# EAGLE board smartsensorPowered (EAGLE 7.4.0)
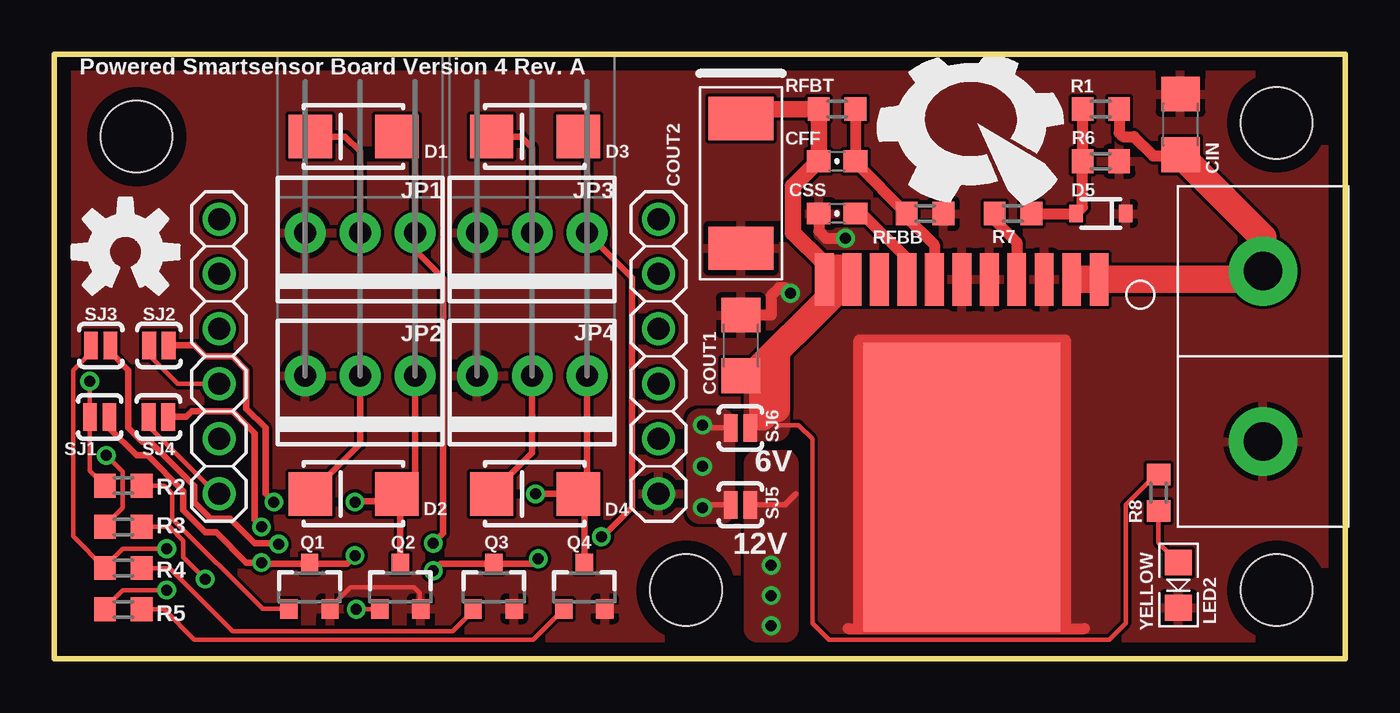
[diagram p0: board, top side]
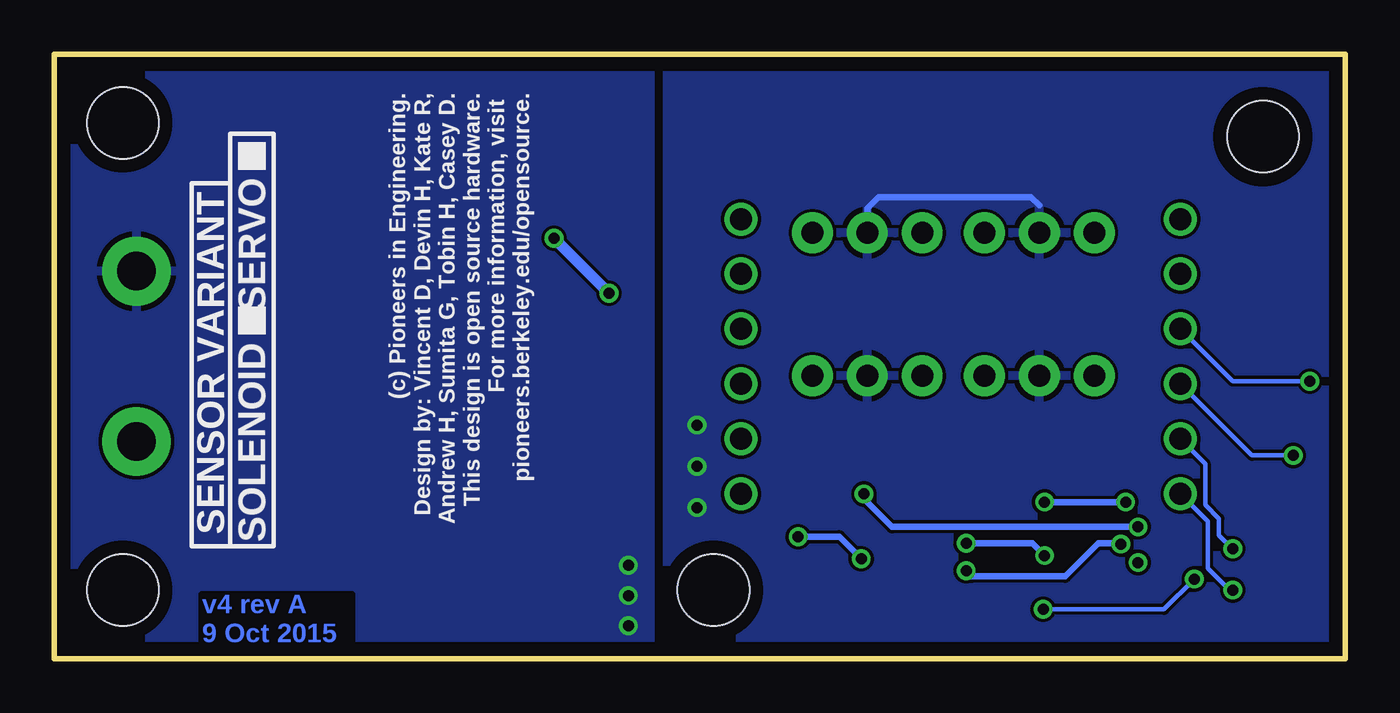
[diagram p1: board, bottom side, seen from below]

Size 59.69 x 27.94 mm. Coordinates in mm from the lower left corner, seen from the top.
Outline: 0,0 59.69,0 59.69,27.94 0,27.94 0,0
Copper layers (1*16): Top 2mil / dielectric 9mil / Bottom 2mil
Design rules "advancedcircuits-33each-pie": minimum track width 6mil, minimum drill 15mil, track to track 6mil, track to pad 6mil, pad to pad 6mil, via to via 6mil, smd to smd 6mil, copper to edge 25mil, drill to drill 7mil, minimum pad ring 7mil, minimum via ring 7mil, stop-mask expansion 3mil, vias tented up to drill 21mil, thermal gap 10mil

## Footprints (pad centres in the part's own frame; a part is rotated, then mirrored left to right if it is on the bottom)
0603-CAP = smd 1.1 x 1: 1 -0.85,0; 2 0.85,0
1206 = smd 1.6 x 1.8: 1 -1.4,0; 2 1.4,0
ANDERSON_VERTICAL = drill 1.778 pad 3.175: PIN1 0,-3.937; PIN2 0,3.937
TANT_CASE_E = smd 2 x 3: NEG 3,0; POS -3,0
SMA-DIODE_ALT = smd 2 x 2: A -2,0; C 2,0
SOD-323 = smd 0.63 x 0.83: 1 -1.15,0; 2 1.15,0
1X03-MTA = drill 1.016 pad 1.88: 1 -2.54,0; 2 0,0; 3 2.54,0
1X06 = drill 1.016 pad 1.524: 1 -6.35,0; 2 -3.81,0; 3 -1.27,0; 4 1.27,0; 5 3.81,0; 6 6.35,0
LED-0805 = smd 1.194 x 1.245: A -1.041,0; C 1.041,0
SOT23-3 = smd 0.8 x 0.9: 1 -0.95,-1; 2 0.95,-1; 3 0,1.1
R0603 = smd 1 x 1.1: 1 -0.85,0; 2 0.85,0
SJ_2S-NO = smd 0.635 x 1.27: 1 -0.45,0; 2 0.45,0
LMZ12010 = smd 0.861 x 2.41: 1 -6.35,-9.601; 2 -5.08,-9.601; 3 -3.81,-9.601; 4 -2.54,-9.601; 5 -1.27,-9.601; 6 0,-9.601; 7 1.27,-9.601; 8 2.54,-9.601; 9 3.81,-9.601; 10 5.08,-9.601; 11 6.35,-9.601 | smd 9.119 x 13.36: GND 0,0
STAND-OFF = hole 3.302: 0,0

## Placement (x,y rotation side)
CFF  4.7nF  [0603-CAP]  36.2,22.99 0 top
CIN  10uF  [1206]  52.07,24.69 90 top
CONN1  ANDERSONVERTICAL  [ANDERSON_VERTICAL]  55.88,13.97 0 top
COUT1  47uF  [1206]  31.75,14.48 90 top
COUT2  470uF  [TANT_CASE_E]  31.75,21.97 270 top
CSS  .47uF  [0603-CAP]  36.2,20.57 180 top
D1  SS16  [SMA-DIODE_ALT]  13.84,24.13 180 top
D2  SS16  [SMA-DIODE_ALT]  13.84,7.62 180 top
D3  SS16  [SMA-DIODE_ALT]  22.23,24.13 180 top
D4  SS16  [SMA-DIODE_ALT]  22.23,7.62 180 top
D5  5.1V  [SOD-323]  48.39,20.57 180 top
JP1  [1X03-MTA]  14.15,19.68 180 top
JP2  [1X03-MTA]  14.15,13.08 180 top
JP3  [1X03-MTA]  22.1,19.68 180 top
JP4  [1X03-MTA]  22.1,13.08 180 top
JP5  [1X06]  7.62,13.97 270 top
JP6  [1X06]  27.94,13.97 270 top
LED2  YELLOW  [LED-0805]  51.97,3.4 270 top
Q1  IRFML8244  [SOT23-3]  11.81,3.3 0 top
Q2  IRFML8244  [SOT23-3]  16,3.3 0 top
Q3  IRFML8244  [SOT23-3]  20.32,3.3 0 top
Q4  IRFML8244  [SOT23-3]  24.51,3.3 0 top
R1  62k  [R0603]  48.39,25.4 0 top
R2  1k  [R0603]  3.2,8 0 top
R3  1k  [R0603]  3.2,6.1 0 top
R4  1k  [R0603]  3.2,4.19 0 top
R5  1k  [R0603]  3.2,2.29 0 top
R6  30k  [R0603]  48.39,22.99 180 top
R7  100  [R0603]  44.32,20.57 180 top
R8  330  [R0603]  51.05,7.67 90 top
RFBB  2.37k  [R0603]  40.26,20.57 0 top
RFBT  15.4k  [R0603]  36.2,25.4 180 top
SJ1  SOLDERJUMPERNO  [SJ_2S-NO]  2.11,11.18 0 top
SJ2  SOLDERJUMPERNO  [SJ_2S-NO]  4.85,14.48 0 top
SJ3  SOLDERJUMPERNO  [SJ_2S-NO]  2.16,14.48 0 top
SJ4  SOLDERJUMPERNO  [SJ_2S-NO]  4.83,11.18 0 top
SJ5  SOLDERJUMPERNO  [SJ_2S-NO]  31.72,7.11 180 top
SJ6  SOLDERJUMPERNO  [SJ_2S-NO]  31.72,10.67 180 top
U$2  [PIE-LOGO-SMALL]  42.67,24.77 0 top
U$3  LMZ12010  [LMZ12010]  41.96,7.92 180 top
U$4  [STAND-OFF]  3.81,24.13 0 top
U$5  [STAND-OFF]  29.21,3.17 0 top
U$6  [STAND-OFF]  56.52,3.17 0 top
U$7  [STAND-OFF]  56.52,24.77 0 top
U$10  [OSHW-LOGO-M]  3.3,18.8 0 top

## Library data of the parts
CFF CIN COUT1 CSS = pie; PIE-INT-REF-NUM: CAPACITOR-GENERIC
CONN1 = pie; PIE-INT-REF-NUM: Anderson
COUT2 = pie; PIE-INT-REF-NUM: CAPACITOR-TANTALUM
D1-D5 = pie; PIE-INT-REF-NUM: DIODE
JP1-JP4 = pie; PIE-INT-REF-NUM: MTA
JP5 JP6 = pie; PARTNUMBER: 965
LED2 = pie; PIE-INT-REF-NUM: LED
Q1-Q4 = pie; PIE-INT-REF-NUM: NMOS
R1-R8 RFBB RFBT = pie; PIE-INT-REF-NUM: RESISTOR-GENERIC
SJ1-SJ6 = pie; PIE-INT-REF-NUM: DNL
U$2 U$4-U$7 U$10 = pie
U$3 = pie; PIE-INT-REF-NUM: LMZ12010

## Nets
6V: CFF.1 COUT1.1 COUT2.POS R8.2 RFBT.2 SJ6.1 U$3.10 U$3.11
12V: CIN.1 CONN1.PIN2 R1.2 SJ5.1 U$3.1 U$3.2
DIODE: D5.2 R1.1 R6.2 R7.1
EN: R7.2 U$3.4
FB: CFF.2 RFBB.1 RFBT.1 U$3.7
GND: CIN.2 CONN1.PIN1 COUT1.2 COUT2.NEG CSS.2 D5.1 JP1.3 JP2.3 JP3.3 JP4.3 JP6.6 LED2.C Q1.2 Q2.2 Q3.2 Q4.2 R6.1 RFBB.2 U$3.3 U$3.5 U$3.6 U$3.GND
IO6: JP5.3 R2.1 SJ1.1
IO7: JP5.4 R3.1 SJ2.1
IO8: JP5.5 R4.1 SJ3.1
IO9: JP5.6 R5.1 SJ4.1
N$1: D1.A JP1.1 Q1.3 SJ1.2
N$2: Q1.1 R2.2
N$3: LED2.A R8.1
N$4: D2.A JP2.1 Q2.3 SJ2.2
N$5: Q2.1 R3.2
N$7: D3.A JP3.1 Q3.3 SJ3.2
N$8: Q3.1 R4.2
N$10: D4.A JP4.1 Q4.3 SJ4.2
N$11: Q4.1 R5.2
SS: CSS.1 U$3.8
VOUT: D1.C D2.C D3.C D4.C JP1.2 JP2.2 JP3.2 JP4.2 SJ5.2 SJ6.2

## Tracks (layer width: path | path; a pad name or v marks a point on that pad's centre or on a via)
6V
  Top 0.203: 33.4,10.67 33.53,10.79 34.42,10.79 35.05,10.16 35.05,1.65 35.81,0.89 48.77,0.89 49.53,1.65 49.53,7.11 50.94,8.52 R8.2 | U$3.11 35.61,16.82 35.56,16.76 | 35.81,18.29 36.07,18.03 36.07,17.02 35.94,17.02 35.94,16.89 35.56,16.51 35.62,16.45 | COUT2.POS 31.93,24.97 32.56,25.61 32.81,25.61 33.02,25.4 | COUT1.1 32.52,13.08 32.77,12.83 | 36.3,16.42 36.52,16.42 | 36.52,16.42 | 36.52,16.42 36.52,16.46 36.83,16.76
  Top 0.254: 32.64,10.67 SJ6.1 33.02,11.51 33.02,12.7
  Top 0.508: 33.78,13.08 33.4,12.7 | 32.77,13.72 33.15,13.72 33.91,14.48 33.91,14.73 33.78,14.61 33.78,13.34 33.66,13.46 32.64,13.46 | 35.18,22.86 35.31,22.99 CFF.1
  Top 0.762: CFF.1 RFBT.2 33.02,25.4 32.77,25.4 | 35.18,22.86 34.16,21.84 34.16,19.68 35.56,18.29 35.56,17.58 U$3.11 35.61,17.83 35.69,17.91 36.5,17.91 U$3.10 36.88,16.94 36.83,16.89 36.83,17.02 36.07,17.02 35.81,17.27 36.45,17.27 36.7,17.53 | 35.81,18.29 36.83,18.29 | 35.56,16.76 36.83,16.76
  Top 1.27: 33.02,12.7 33.4,12.32 | 33.4,12.32 33.4,11.56 33.15,11.56 32.77,11.18 32.77,12.83 | 33,13.36 33.38,13.36 33.4,13.34 | 33.4,13.34 33.4,12.7 33.4,12.32 | 33.4,13.34 33.4,13.46 32.64,13.46 35.62,16.45 36.01,16.83
  pour Top: 32.51,10.67 32.51,13.21 33.4,13.46 33.4,10.67
12V  (via drill 0.51)
  Top 0.254: SJ5.1 33.78,7.11 34.29,7.62 | U$3.2 47.37,17.53 | 48.01,17.53 U$3.1
  Top 0.508: R1.2 49.24,24.3 49.4,24.13 49.91,24.13 50.8,23.24 52.02,23.24 CIN.1
  Top 1.27: CIN.1 55.88,19.48 CONN1.PIN2 55.5,17.53 U$3.1 | 47.37,17.53 48.01,17.53
  other vias: 33.15,4.32 33.15,2.92 33.15,1.52
  pour Bottom (rank 6): 32.13,0 32.13,27.94 59.69,27.94 59.69,0
  pour Top: 32.51,9.02 32.51,1.4 33.78,1.4 33.78,9.02
DIODE
  Top 0.508: R7.1 D5.2 47.54,20.87 R6.2 R1.1
EN
  Top 0.508: R7.2 43.47,20.28 44.5,19.25 U$3.4
FB
  Top 0.508: U$3.7 40.69,19.13 39.41,20.41 RFBB.1 37.05,22.94 CFF.2 RFBT.1
GND  (via drill 0.51)
  Top 0.203: Q1.2 12.76,2.35 13.72,3.3 16.64,3.3 16.89,3.05 16.89,2.36 Q2.2 | 36.7,1.4 37.08,1.4 37.21,1.52
  Top 0.305: 25.7,2.54 Q4.2 25.46,2.35
  Top 0.508: 37.21,1.52 37.21,14.73 46.74,14.73 46.74,1.52 | 36.7,1.4 47.62,1.4 | CSS.2 35.34,19.77 35.69,19.43 v36.58,19.43 | COUT1.2 33.14,15.88 33.15,15.88 33.15,16.76 33.53,17.14 33.78,17.14 v34.04,16.89
  Bottom 0.508: v36.58,19.43 v34.04,16.89
  pour Top (rank 3): 0,0 0,27.94 59.69,27.94 59.69,0
IO6  (via drill 0.51)
  Top 0.203: R2.1 1.66,8.69 SJ1.1 1.66,12.69 1.65,12.7 v1.65,12.83
  Bottom 0.203: v1.65,12.83 5.21,12.83 JP5.3
IO7  (via drill 0.51)
  Top 0.203: R3.1 2.35,6.16 3.17,6.99 3.17,8.64 v2.41,9.4 | SJ2.1 4.4,14.01 5.71,12.7 JP5.4
  Bottom 0.203: v2.41,9.4 4.32,9.4 JP5.4
IO8  (via drill 0.51)
  Top 0.203: v5.21,5.08 3.17,5.08 2.35,4.25 R4.1 0.89,5.65 0.89,13.34 1.71,14.15 SJ3.1
  Bottom 0.203: JP5.5 6.48,9.02 6.48,7.11 5.84,6.48 5.84,5.71 v5.21,5.08
IO9  (via drill 0.51)
  Top 0.203: R5.1 2.35,2.35 3.17,3.17 v5.21,3.17 | SJ4.1 4.38,10.74 7.24,7.87 7.37,7.87 JP5.6
  Bottom 0.203: v5.21,3.17 5.33,3.17 6.35,4.19 6.35,6.35 JP5.6
N$1  (via drill 0.51)
  Top 0.203: D1.A 15.88,24.13 | 11.83,4.42 Q1.3
  Top 0.305: 15.88,24.13 16.69,23.32 JP1.1 16.69,18.87 17.98,17.58 17.98,5.79 v17.53,5.33 | v13.91,4.77 13.54,4.4 Q1.3 9.63,4.4 v9.59,4.45 8.89,4.45 7.49,5.84 6.99,5.84 5.97,6.86 5.97,7.75 4.32,9.4 3.81,9.4 2.56,10.65 SJ1.2
  Bottom 0.305: v17.53,5.33 14.47,5.33 v13.91,4.77
N$2
  Top 0.203: 10.85,2.29 Q1.1 9.64,2.3 5.46,6.48 5.46,7.62 5.08,8 R2.2
  Top 0.305: 10.72,2.16 Q1.1
N$3
  Top 0.203: R8.1 51.05,5.36 LED2.A
N$4  (via drill 0.51)
  Top 0.203: D2.A 15.84,7.27 16,7.11 | 13.94,7.27 v13.91,7.24
  Top 0.305: JP2.1 16.69,8.46 D2.A | 16,7.11 Q2.3 | 15.84,7.27 13.94,7.27 | SJ2.2 6.48,14.48 6.99,13.97 8.26,13.97 8.89,13.34 8.89,11.56 9.78,10.67 9.78,7.62 v10.16,7.24
  Bottom 0.305: v13.91,7.24 v10.16,7.24
N$5  (via drill 0.51)
  Top 0.203: 15.05,2.35 Q2.1 15.04,2.29 v13.97,2.29 | R3.2 5.33,6.1 5.97,5.46 5.97,4.7 v6.99,3.68
  Bottom 0.203: v6.99,3.68 8.38,2.29 v13.97,2.29
N$7  (via drill 0.51)
  Top 0.203: D3.A 24.26,24.13 24.64,23.75 | v25.3,5.64 25.35,5.64 | 20.34,4.38 Q3.3 | SJ3.2 2.61,14.15 | 10.35,5.33 v10.38,5.3
  Top 0.305: 24.64,23.75 JP3.1 26.72,17.6 26.72,7.01 25.35,5.64 | 20.34,4.38 22.14,4.38 v22.38,4.62 | Q3.3 17.86,4.4 v17.53,4.06 | 2.61,14.15 3.43,13.34 3.43,10.67 4.06,10.03 4.45,10.03 6.48,8 6.48,7.24 7.24,6.48 8.13,6.48 9.27,5.33 10.35,5.33
  Bottom 0.305: v17.53,4.06 17.27,3.81 12.95,3.81 11.43,5.33 10.41,5.33 v10.38,5.3 | v25.3,5.64 23.39,5.64 v22.38,4.62
N$8
  Top 0.203: Q3.1 19.37,2.23 18.41,1.27 8.26,1.27 5.33,4.19 R4.2
N$10  (via drill 0.51)
  Top 0.203: 24.64,8.03 D4.A 24.26,7.62 24.51,7.37
  Top 0.305: JP4.1 24.64,8.03 | 24.51,7.37 Q4.3 | v22.26,7.62 D4.A | SJ4.2 6.1,11.18 6.35,11.43 8.26,11.43 9.27,10.41 9.27,6.41 v9.59,6.1
  Bottom 0.305: v9.59,6.1 20.95,6.1 22.26,7.4 v22.26,7.62
N$11
  Top 0.203: 23.56,2.25 Q4.1 22.15,0.89 6.48,0.89 5.08,2.29 R5.2
SS
  Top 0.508: 37.21,20.57 CSS.1 37.34,20.57 39.37,18.54 39.37,17.6 39.42,17.55 U$3.8
VOUT  (via drill 0.51)
  Top 0.254: SJ5.2 30.1,7.11 v29.97,6.99 | SJ6.2 30.1,10.67 v29.97,10.79
  Top 0.305: D1.C 13.46,24.13 14.15,23.44 JP1.2 | JP2.2 14.15,9.93 D2.C | 21.08,24.13 D3.C 21.59,24.13 22.1,23.62 JP3.2 | D4.C 20.23,7.65 22.1,9.53 JP4.2
  Bottom 0.305: 14.15,20.95 14.53,21.34 21.59,21.34 22.1,20.83 JP3.2
  other vias: 29.97,8.89
  pour Bottom: 0,0 0,27.94 31.37,27.94 31.37,0
  pour Top: 29.84,10.92 30.86,10.92 30.86,6.86 29.84,6.86

## Text on the board
Bottom: v4 rev A / 9 Oct 2015
tPlace: Powered Smartsensor Board Version 4 Rev. A | 6V | 12V
bPlace: (c) Pioneers in Engineering. / Design by: Vincent D, Devin H, Kate R, / Andrew H, Sumita G, Tobin H, Casey D. / This design is open source hardware. / For more information, visit / pioneers.berkeley.edu/opensource. | SERVO | SENSOR VARIANT | SOLENOID